# Altium PCB solar.PcbDoc
Units mm, origin at the board's own origin, x right, y up, seen from the top; angles counter-clockwise.
Board outline 44.2 x 37.85 mm, 2 copper layers (Top Layer, Bottom Layer); 9 components, 7 nets, 24 pads, 0 vias.
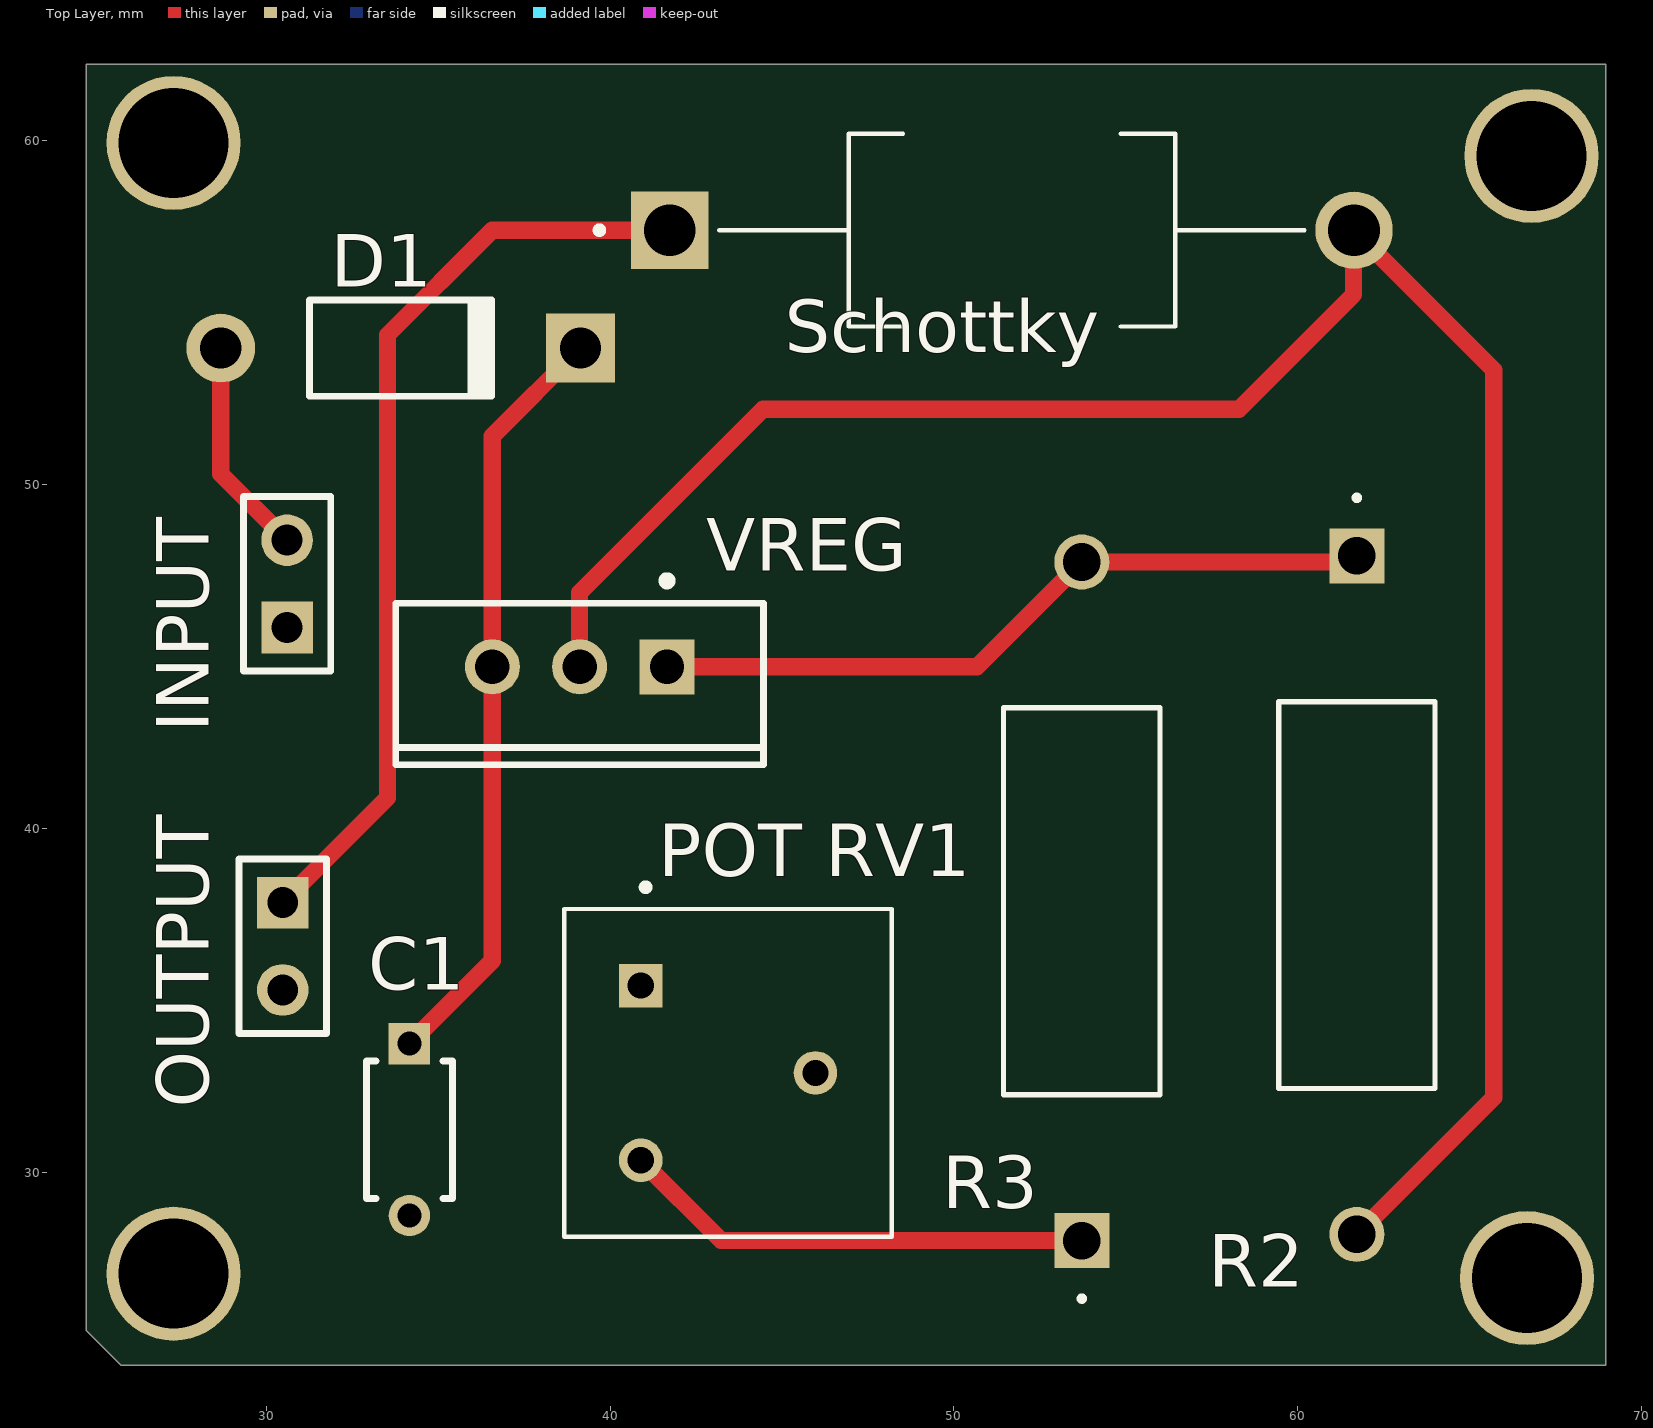
[diagram p0: Top Layer view]
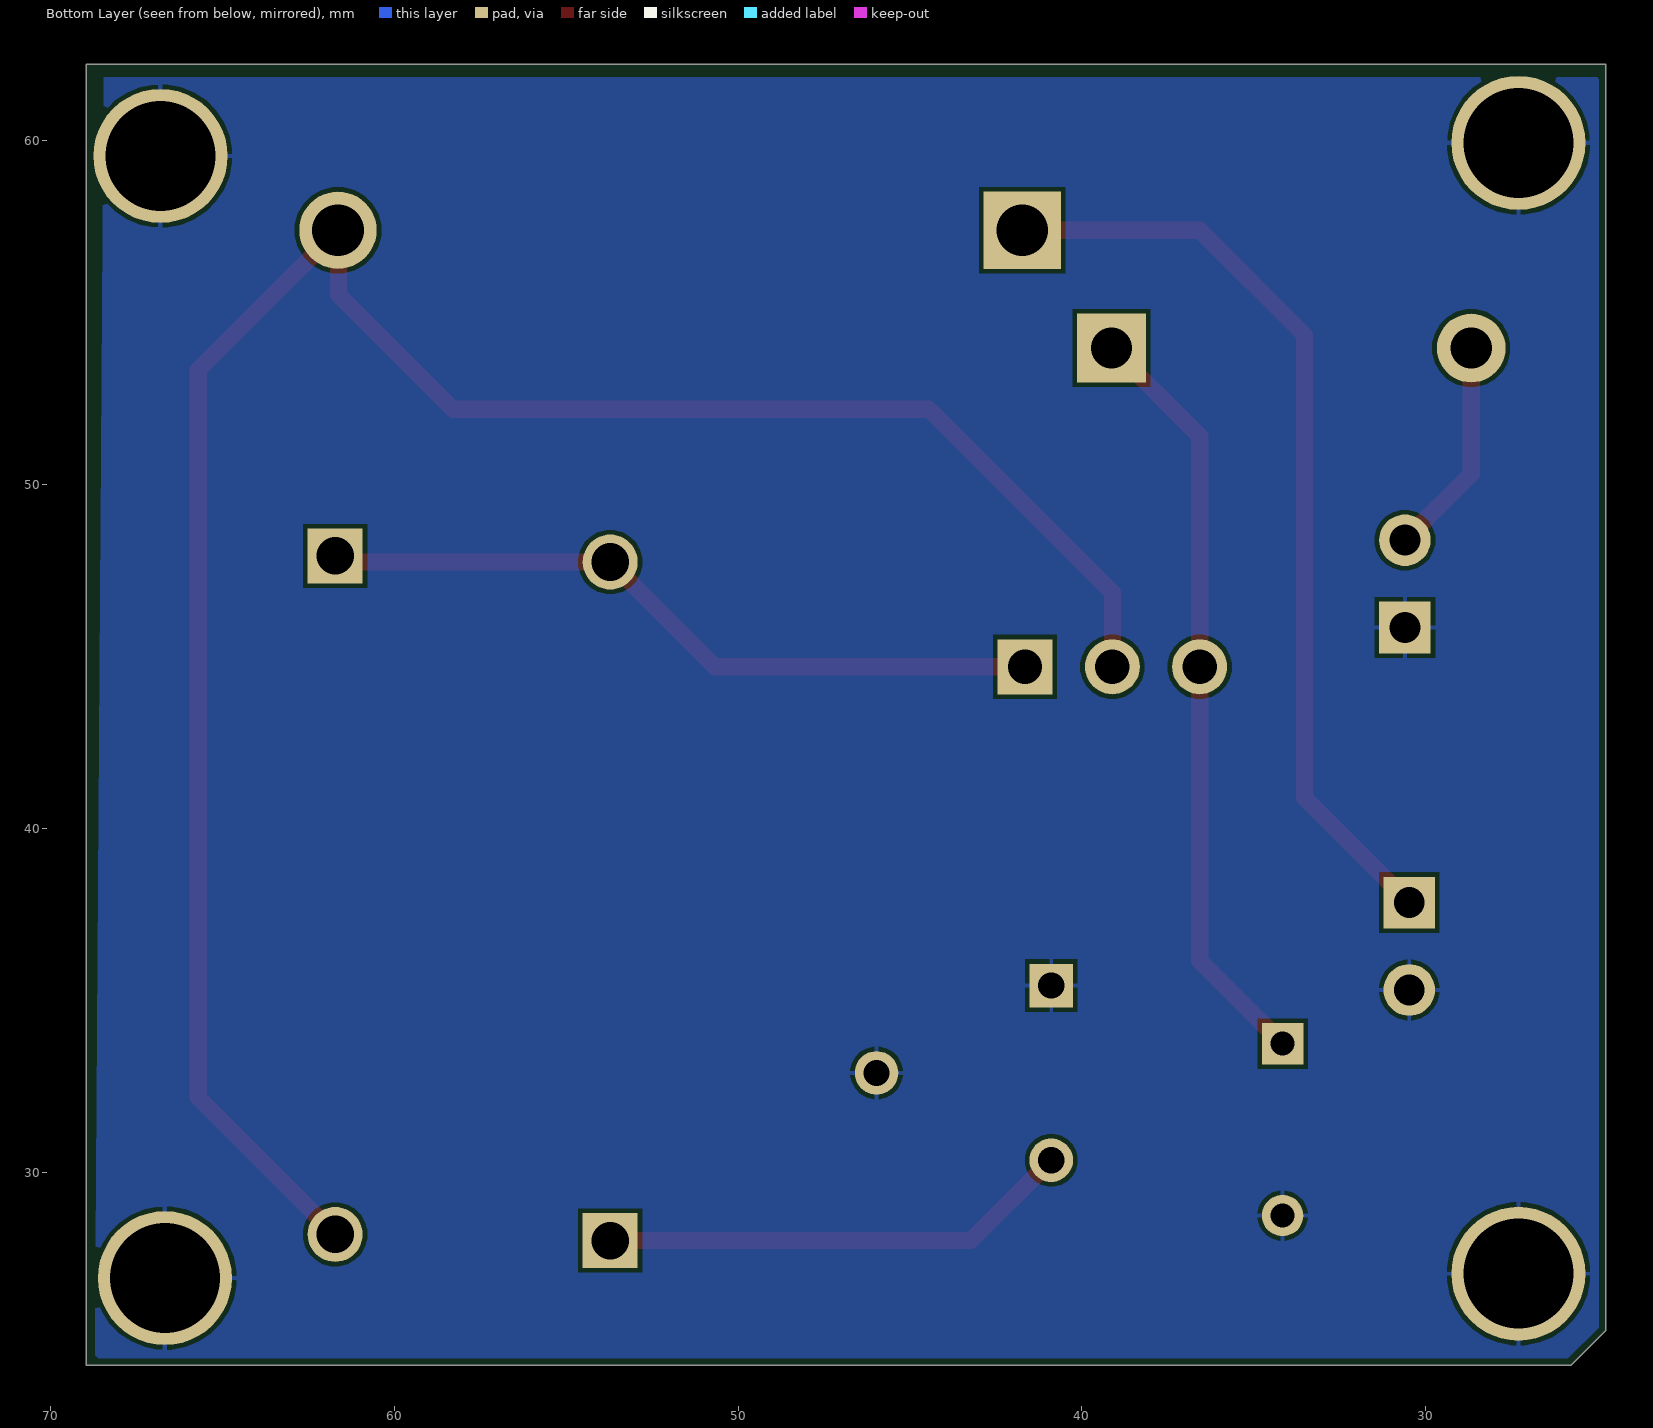
[diagram p1: Bottom Layer view, seen from below]

## Layer stack, top to bottom
Top Solder: solder mask 0.0102, Solder Resist, Dk 3.5
Top Layer: signal copper 0.0356
Dielectric 1: dielectric 0.32, FR-4, Dk 4.8
Bottom Layer: signal copper 0.0356
Bottom Solder: solder mask 0.0102, Solder Resist, Dk 3.5

## Board outline
24.765,62.23 24.765,25.4 25.781,24.384 68.961,24.384 68.961,62.23

## Design rules (kind name [scope] priority, off if disabled: settings)
BoardOutlineClearance [All] p1: gap=0.2 ignorepadtopadclearanceinfootprint=FALSE
Clearance [All] p1: gap=0.127 ignorepadtopadclearanceinfootprint=FALSE except(0.25: Arc-Hole Track-Hole SMDPad-Hole THPad-Hole Via-Hole Fill-Hole Poly-Hole Region-Hole Text-Hole)
ComponentClearance [All] p1: gap=0.127 collisioncheckmode=3 verticalgap=0.127 showdistances=TRUE
DiffPairsRouting [All] p1: maxlimit=0.254 minlimit=0.127 mostfreqgap=0.127 toplayer_minwidth=0.127 toplayer_maxwidth=25.4 toplayer_prefwidth=0.127 bottomlayer_minwidth=0.127 bottomlayer_maxwidth=25.4 bottomlayer_prefwidth=0.127 maxuncoupledlength=12.7
Height [All] p1: minheight=0 maxheight=1816.048 prefheight=12.7
HoleSize [All] p1: absolutevalues=TRUE maxlimit=6.3 minlimit=0.3 maxpercent=80.000 minpercent=20.000
HoleToHoleClearance [All] p1: gap=0.25 allowstackedmicrovias=FALSE
MinimumAnnularRing [All] p1: minimumring=0.076
MinimumSolderMaskSliver [All] p1: minsoldermaskwidth=0
PlaneClearance [All] p1: clearance=0.127
PlaneConnect PlaneConnectPowerPads [InPadClass('PowerPads')] p1: planeconnectstyle=Direct reliefexpansion=0.508 reliefentries=4 reliefconductorwidth=0.254 reliefairgap=0.254
PlaneConnect [All] p2: pad.planeconnectstyle=Relief pad.reliefexpansion=0.3 pad.reliefentries=4 pad.reliefconductorwidth=0.127 pad.reliefairgap=0.127 via.planeconnectstyle=Direct via.reliefexpansion=0.3 via.reliefentries=4 via.reliefconductorwidth=0.127 via.reliefairgap=0.127
PolygonConnect PolygonConnectPowerPads [All vs (InPadClass('PowerPads'))] p1: connectstyle=Direct reliefconductorwidth=0.254 reliefentries=4 polygonreliefangle="90 Angle" airgapwidth=0.254
PolygonConnect [All] p2: thpad.connectstyle=Relief thpad.reliefconductorwidth=0.127 thpad.reliefentries=4 thpad.polygonreliefangle="90 Angle" thpad.airgapwidth=0.127 smdpad.connectstyle=Relief smdpad.reliefconductorwidth=0.127 smdpad.reliefentries=4 smdpad.polygonreliefangle="90 Angle" smdpad.airgapwidth=0.127 via.connectstyle=Direct via.reliefconductorwidth=0.127 via.reliefentries=4 via.polygonreliefangle="90 Angle" via.airgapwidth=0.127
RoutingVias [All] p1: holewidth=0.3 width=0.6 viastyle="Through Hole" minholewidth=0.3 minwidth=0.6 maxholewidth=0.6 maxwidth=6.6
SilkToSilkClearance [All] p1: silktosilkclearance=0
SilkToSolderMaskClearance [IsPad] p1: minsilkscreentomaskgap=0.127 clearancetoexposedcopper=TRUE
SolderMaskExpansion [All] p1: expansion=0.075 istentingtop=FALSE
Width [All] p1: maxlimit=25.4 minlimit=0.127 preferedwidth=0.5 minimp=50.000000 maximp=50.000000 favimp=50.000000
20 further rules are at their usual default settings.

## Components (designator, comment, footprint, x,y, rotation, side; value= is the part's Value field where it differs from the comment)
C1 "0.1uf" FP-RDE0M1-MFG 34.163,31.242 r270 top
D1 "Diode 1N4007" DO-41 33.909,53.975 r0 top (schematic designator D1N4007)
INPUT "Header 2" HDR1X2 30.607,45.847 r90 top
OUTPUT "Header 2" HDR1X2 30.48,37.846 r270 top
"POT RV1" "3310Y-001-202L" TRIM_3310Y-001-202L 43.434,32.893 r270 top
R2 "220" RES_AC01_VIS 61.722,47.93 r270 top
R3 "220" RES_AC01_VIS 53.721,28.016 r90 top
Schottky "SB350" DIOAD1990W125L950D560 51.689,57.404 r0 top (schematic designator schottky)
VREG "LM317T" NDE0003A 39.116,44.704 r180 top

## Footprints (in the part's own frame and the unit in brackets; to place one, negate y for a bottom-side part, rotate by r counter-clockwise, add the part's x,y. Pads: shape width x height; smd on the part's side, far side on the other; paste and mask are expansions set on the pad)
DIOAD1990W125L950D560 [mm]
  round 2.25 hole 1.5: A(9.95,0)
  rect 2.25x2.25 hole 1.5: C(-9.95,0)
  silkscreen extent -12.1,-2.8 8.51,2.8, body extent -2.54,-2.54 2.54,2.54, height 30.16
DO-41 [mm] "Diode, Axial; Body 5.2 x 2.7 mm (LxDia. max), Lead Dia. 0.86 mm (max)"
  round 2 hole 1.2: 1(-5.23,0)
  rect 2x2 hole 1.2: 2(5.23,0)
  silkscreen extent -2.65,-1.4 2.75,1.4
FP-RDE0M1-MFG [mm]
  rect 1.2x1.2 hole 0.7 paste-1000 mask+0: 1(-2.5,0)
  round 1.2 hole 0.7 paste-1000 mask+0: 2(2.5,0)
  silkscreen extent -2,-1.25 2,1.25, body extent -3.2,-1.35 3.2,1.35, height 0.25
HDR1X2 [mm] "Connector; Header; 2 Position"
  rect 1.5x1.5 hole 0.9: 1(0,0)
  round 1.5 hole 0.9: 2(2.54,0)
  silkscreen extent -1.27,-1.27 3.81,1.27
NDE0003A [mm] "FM, 3-Leads, Body 10.7x4.7mm, Pitch 2.54mm"
  rect 1.6x1.6 hole 1: 1(-2.54,0)
  round 1.6 hole 1: 2(0,0) 3(2.54,0)
  silkscreen extent -5.35,-2.62 5.35,2.85, body extent -5.4,-1.9 5.4,2.9, height 19.4
RES_AC01_VIS [mil]
  rect 63x63 / inner round 60 / far side rect 63x63 hole 43 paste-31.5 mask+0: 1(0,0)
  round 63 / inner round 60 / far side round 63 hole 43 paste-31.5 mask+0: 2(777,0)
  silkscreen extent -69,-89 610,90, body extent -16,-84 794,84, height 169
TRIM_3310Y-001-202L [mm]
  rect 1.268x1.268 / inner round 1.268 / far side rect 1.268x1.268 hole 0.76: 1(-2.54,-2.54)
  round 1.268 hole 0.76: 2(0,2.54) 3(2.54,-2.54)
  silkscreen extent -5.5,-4.76 4.76,4.76

## Part data
C1: library part CMP-06035-051680-1, "Ceramic Capacitor 100nF ±10% 50V X7R Radial", Capacitance=100nF, Case/Package=Radial, Dielectric=X7R, Max Operating Temperature=125°C, Min Operating Temperature=-55°C, Package Quantity=2000, Resistor Type=Ceramic, Tolerance=10%, Voltage Rating=50V, Height=3.5mm, Height - Seated (Max)=0.236inch, Lead Diameter=0.5mm, Lead Free="Lead Free", Lead Pitch=0.197inch, Lead/Base Style=Kinked, Length=0.157inch, Mount="Through Hole", Packaging="Tape and Reel", Termination=Radial, Voltage Rating (DC)=50V, Width=3.5mm
D1: "1 Amp General Purpose Rectifier", Code_JEDEC=DO-204-AL, ComponentLink1Description="Manufacturer Link", ComponentLink1URL=http://www.fairchildsemi.com/, ComponentLink2Description=Datasheet, ComponentLink2URL=http://www.fairchildsemi.com/ds/1N%2F1N4001.pdf, DatasheetVersion=1998, LatestRevisionDate=17-Jul-2002, LatestRevisionNote="Re-released for DXP Platform.", PackageDescription="Diode, Axial; Body 5.2 x 2.7 mm (LxDia. max), Lead Dia. 0.86 mm (max)", PackageReference=DO-41, PackageVersion=Aug-1999, Published=8-Jun-2000, Publisher="Altium Limited"
INPUT OUTPUT: "Header, 2-Pin", LatestRevisionDate=17-Jul-2002, LatestRevisionNote="Re-released for DXP Platform.", Publisher="Altium Limited"
"POT RV1": "Potentiometer Conductive Plastic 2k Power 0.25W Shaft Dia 0.125In 3310 Series", Package=None, Check_prices=https://www.snapeda.com/parts/3310Y-001-202L/Bourns+-+J.W.+Miller/view-part/?ref=eda, MF=Bourns, MP=3310Y-001-202L, SnapEDA_Link=https://www.snapeda.com/parts/3310Y-001-202L/Bourns+-+J.W.+Miller/view-part/?ref=snap
R2 R3: library part CMP-00030-39747107-1, "AC01000006809JA100 Resistor, 68 Ohm, ± 5%, 1 W, Axial Leaded, Wirewound, General Purpose", Case/Package=Axial, Max Operating Temperature=275°C, Max Power Dissipation=1W, Min Operating Temperature=-40°C, Resistance=68Ω, Temperature Coefficient=180ppm/°C, Tolerance=5%, Voltage Rating (DC)=8V, Composition=Wirewound, Contact Plating=Tin, Diameter=4.3mm, Features="Flame Retardant Coating", Lead Diameter=800µm, Length=11mm, NexarPartId=39747107, Number of Pins=2, Number of Terminations=2, Packaging="Tape & Box (TB)", Power Rating=1W, REACH SVHC=Unknown, RoHS=Compliant, Schedule B="8533210080, 8533210080", Termination=Axial
Schottky: "Diode Schottky 60V 3A Through Hole DO-201AD", Package="AXIAL LEAD-2 ON Semiconductor", Availability=Warning, Check_prices=https://www.snapeda.com/parts/SB350/ON%20Semiconductor/view-part/4995705/?ref=eda, MF="ON Semiconductor", MP=SB350, Price=None, Purchase-URL=https://pricing.snapeda.com/search/part/SB350/?ref=eda, SnapEDA_Link=https://www.snapeda.com/parts/SB350/ON%20Semiconductor/view-part/4995705/?ref=snap
VREG: library part CMP-0062-02456-3, "3-Terminal Adjustable Regulator, 3-pin TO-220", Manufacturer="Texas Instruments", PackageTopMarking="NSUZXYTTE#*LM317T P+", PowerWise=N, ComponentLink1Description="Datasheet URL", ComponentLink1URL=http://www.ti.com/general/docs/lit/getliterature.tsp?genericPartNumber=LM317-N&fileType=pdf, CompType="LDO IC", PackageDescription="TO-220, Molded, 3 Lead, Straight", PackageReference=NDE0003A, PinCount=3, RoHS=N

## Free pads (board coordinates)
  round 3.9 hole 3.2: 5(27.305,27.051) 6(27.305,59.944) 7(66.802,59.563) 8(66.675,26.924)

## Nets (pads, with @x,y where several pads share a name; then routed paths per layer and width w, separated by ;. In a path a pad name is that pad's centre, name@x,y a point inside that pad or via, vN(x,y) a via of type N, cw(c..) or ccw(c..) an arc to the next point about the centre after c; other vN are vias at no path point)
GND: "POT RV1.1" "POT RV1.2" C1.2 INPUT.1 OUTPUT.2 pad.5 pad.6 pad.7 pad.8
NetC1_1: C1.1 D1.2 VREG.3 | length 22.3
  Top Layer w0.5: C1.1 36.576,36.155 VREG.3 36.576,51.412 D1.2
NetD1N4007_1: D1.1 INPUT.2 | length 6.4
  Top Layer w0.5: D1.1 28.679,50.315 INPUT.2
NetOUTPUT_1: OUTPUT.1 Schottky.C | length 27.2
  Top Layer w0.5: OUTPUT.1 33.528,40.894 33.528,54.356 36.576,57.404 Schottky.C
"NetPOT RV1_3": "POT RV1.3" R3.1 | length 13.8
  Top Layer w0.5: 40.894,30.353 43.231,28.016 R3.1
NetR2_1: R2.1 R3.2 VREG.1 | length 21.4
  Top Layer w0.5: VREG.1 50.673,44.704 R3.2 61.544,47.752 R2.1
NetR2_2: R2.2 Schottky.A VREG.2 | length 62.7
  Top Layer w0.5: VREG.2 39.116,46.863 44.45,52.197 58.293,52.197 61.625,55.529 61.625,57.39 Schottky.A 65.703,53.34 65.703,32.175 R2.2

## Polygon pours and split planes (outlines as drawn)
GND on Bottom Layer "GND_L02_P000" (solid, pour order 0): 68.453,61.849 25.019,61.849 24.892,61.722 24.892,25.527 25.908,24.511 68.707,24.511